# EAGLE board EEPROM AT28C16 Helper (EAGLE 7.6.0)
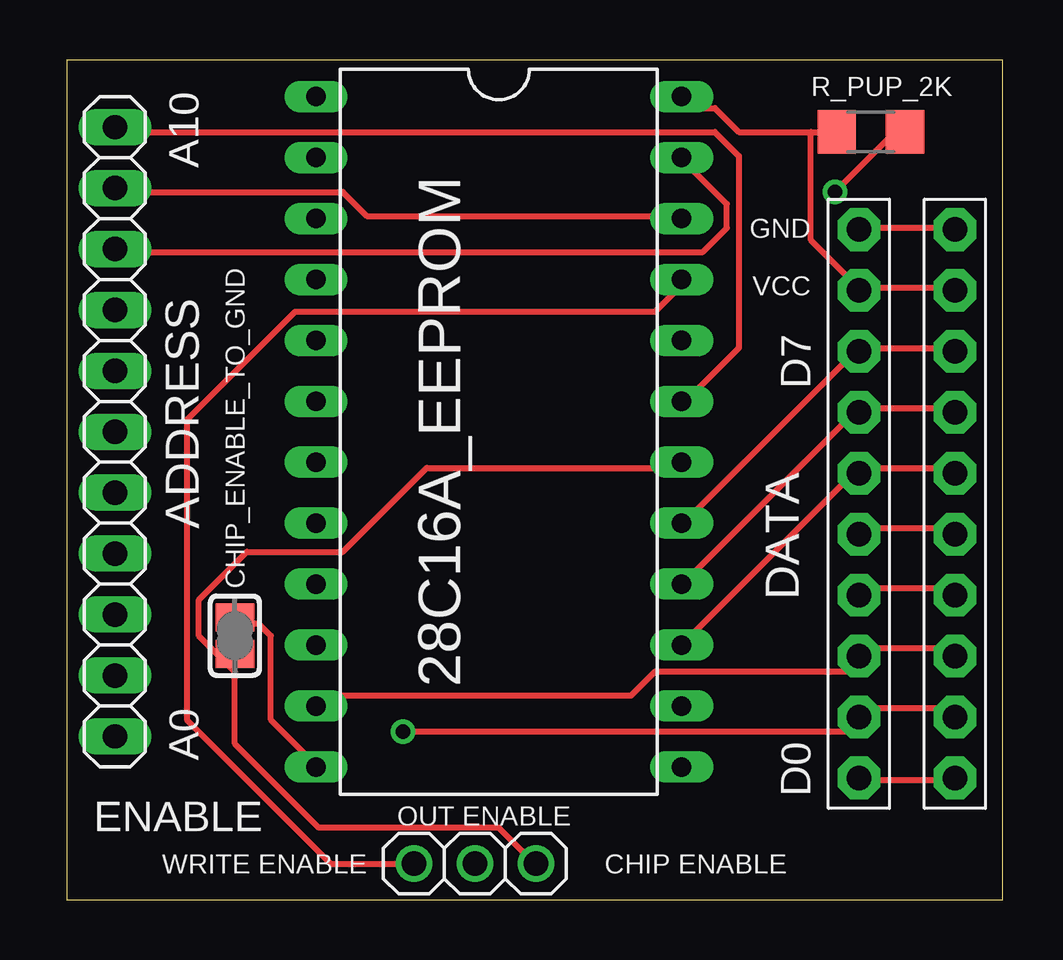
[diagram p0: board, top side]
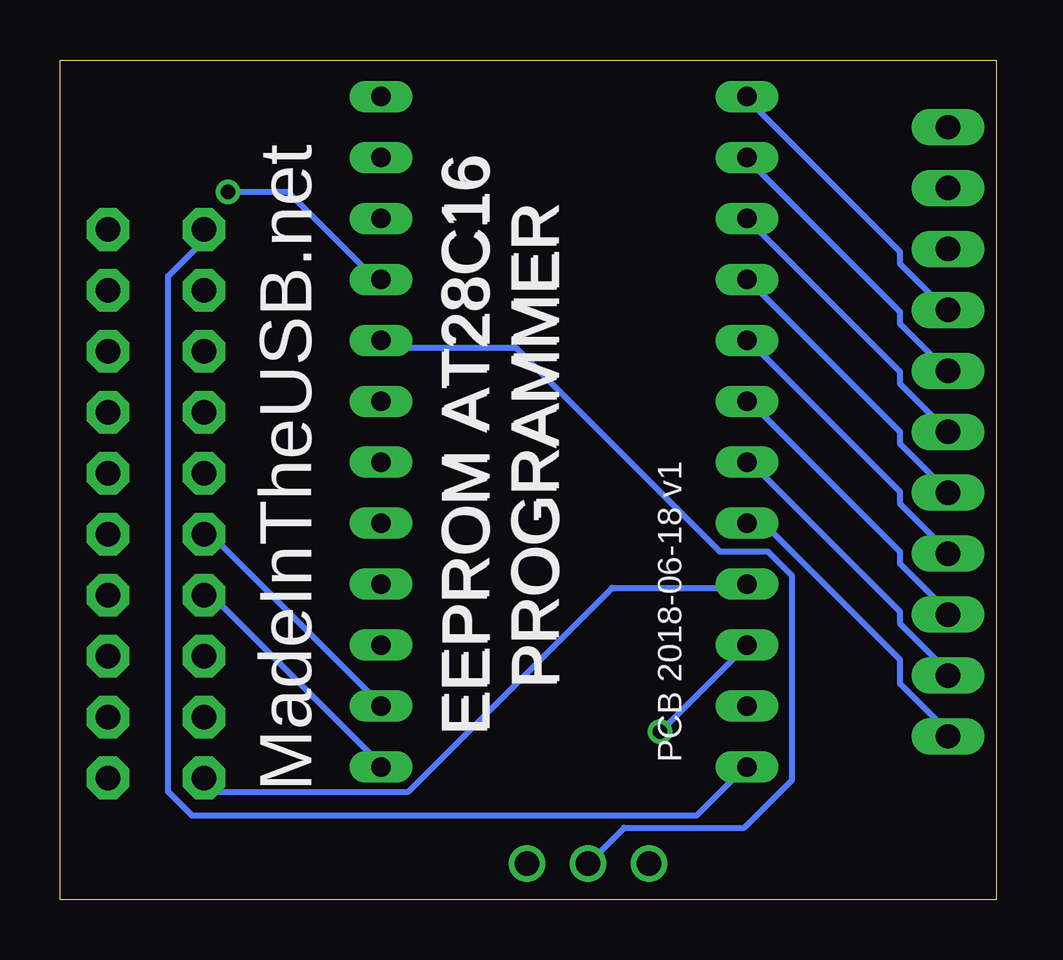
[diagram p1: board, bottom side, seen from below]

Size 39 x 35 mm. Coordinates in mm from the lower left corner, seen from the top.
Outline: 0,0 39,0 39,35 0,35 0,0
Copper layers (1*16): Top 0.035mm / dielectric 1.5mm / Bottom 0.035mm
Design rules "default": minimum track width 10mil, minimum drill 24mil, track to track 8mil, track to pad 8mil, pad to pad 8mil, via to via 8mil, smd to smd 8mil, copper to edge 40mil, drill to drill 8mil, minimum pad ring 10mil, minimum via ring 8mil, stop-mask expansion 4mil, vias tented up to drill 0mil, thermal gap 10mil

## Footprints (pad centres in the part's own frame; a part is rotated, then mirrored left to right if it is on the bottom)
DIL24-6 = drill 0.813 long: 1 -13.97,-7.62; 2 -11.43,-7.62; 3 -8.89,-7.62; 4 -6.35,-7.62; 5 -3.81,-7.62; 6 -1.27,-7.62; 7 1.27,-7.62; 8 3.81,-7.62; 9 6.35,-7.62; 10 8.89,-7.62; 11 11.43,-7.62; 12 13.97,-7.62; 13 13.97,7.62; 14 11.43,7.62; 15 8.89,7.62; 16 6.35,7.62; 17 3.81,7.62; 18 1.27,7.62; 19 -1.27,7.62; 20 -3.81,7.62; 21 -6.35,7.62; 22 -8.89,7.62; 23 -11.43,7.62; 24 -13.97,7.62
1X11 = drill 1.016 long: 1 -12.7,0; 2 -10.16,0; 3 -7.62,0; 4 -5.08,0; 5 -2.54,0; 6 0,0; 7 2.54,0; 8 5.08,0; 9 7.62,0; 10 10.16,0; 11 12.7,0
SOLDERJUMPER_REFLOW = smd 1.168 x 1.6: 1 -0.762,0; 2 0.762,0
1X10-BIG = drill 1.016 pad 1.778 octagon: 1 -11.43,0; 2 -8.89,0; 3 -6.35,0; 4 -3.81,0; 5 -1.27,0; 6 1.27,0; 7 3.81,0; 8 6.35,0; 9 8.89,0; 10 11.43,0
1X03 = drill 1.016: 1 -2.54,0; 2 0,0; 3 2.54,0
R1206 = smd 1.6 x 1.803: 1 -1.422,0; 2 1.422,0

## Placement (x,y rotation side)
28C16A_EEPROM  28C16AP  [DIL24-6]  18,19.5 270 top
ADDRESS  [1X11]  2,19.5 90 top
CHIP_ENABLE_TO_GND  [SOLDERJUMPER_REFLOW]  7,11 270 top
DATA  PINHD-1X10  [1X10-BIG]  33,16.5 90 top
DATA2  PINHD-1X10  [1X10-BIG]  37,16.5 90 top
ENABLE  [1X03]  17,1.5 0 top
R_PUP_2K  [R1206]  33.5,32 0 top

## Library data of the parts
28C16A_EEPROM = microchip; MPN: CAT28C16ALI-12; OC_FARNELL: 1718292; OC_NEWARK: 06R0648
ADDRESS = pinhead
CHIP_ENABLE_TO_GND = microbuilder
DATA DATA2 ENABLE R_PUP_2K = adafruit

## Nets
A0: 28C16A_EEPROM.8 ADDRESS.1
A1: 28C16A_EEPROM.7 ADDRESS.2
A2: 28C16A_EEPROM.6 ADDRESS.3
A3: 28C16A_EEPROM.5 ADDRESS.4
A4: 28C16A_EEPROM.4 ADDRESS.5
A5: 28C16A_EEPROM.3 ADDRESS.6
A6: 28C16A_EEPROM.2 ADDRESS.7
A7: 28C16A_EEPROM.1 ADDRESS.8
A8: 28C16A_EEPROM.23 ADDRESS.9
A9: 28C16A_EEPROM.22 ADDRESS.10
A10: 28C16A_EEPROM.19 ADDRESS.11
CHIP_ENABLE: 28C16A_EEPROM.18 CHIP_ENABLE_TO_GND.2 ENABLE.3
D0: 28C16A_EEPROM.9 DATA2.1 DATA.1
D1: 28C16A_EEPROM.10 DATA2.2 DATA.2
D2: 28C16A_EEPROM.11 DATA2.3 DATA.3
D3: 28C16A_EEPROM.13 DATA2.4 DATA.4
D4: 28C16A_EEPROM.14 DATA2.5 DATA.5
D5: 28C16A_EEPROM.15 DATA2.6 DATA.6
D6: 28C16A_EEPROM.16 DATA2.7 DATA.7
D7: 28C16A_EEPROM.17 DATA2.8 DATA.8
GND: 28C16A_EEPROM.12 CHIP_ENABLE_TO_GND.1 DATA2.10 DATA.10
OUT_ENABLE: 28C16A_EEPROM.20 ENABLE.2
VCC: 28C16A_EEPROM.24 DATA2.9 DATA.9 R_PUP_2K.1
WRITE_ENABLE: 28C16A_EEPROM.21 ENABLE.1 R_PUP_2K.2

## Tracks (layer width: path | path; a pad name or v marks a point on that pad's centre or on a via)
A0
  Bottom 0.254: 28C16A_EEPROM.8 10,15.5 9.5,15.5 4,10 4,9 2,7 ADDRESS.1
A1
  Bottom 0.254: 28C16A_EEPROM.7 10,18 4,12 4,11.5 2,9.5 ADDRESS.2
A2
  Bottom 0.254: 28C16A_EEPROM.6 10,20.5 4,14.5 4,14 2,12 ADDRESS.3
A3
  Bottom 0.254: 28C16A_EEPROM.5 10,23 4,17 4,16.5 2,14.5 ADDRESS.4
A4
  Bottom 0.254: 28C16A_EEPROM.4 10,25.5 4,19.5 4,19 2,17 ADDRESS.5
A5
  Bottom 0.254: ADDRESS.6 4,21.5 4,22 10,28 28C16A_EEPROM.3
A6
  Bottom 0.254: 28C16A_EEPROM.2 10,30.5 4,24.5 4,24 2,22 ADDRESS.7
A7
  Bottom 0.254: 28C16A_EEPROM.1 10,33 4,27 4,26.5 2,24.5 ADDRESS.8
A8
  Top 0.254: 28C16A_EEPROM.23 26,30.5 27.5,29 27.5,28 26.5,27 2,27 ADDRESS.9
A9
  Top 0.254: 28C16A_EEPROM.22 25.5,28.5 12.5,28.5 11.5,29.5 2,29.5 ADDRESS.10
A10
  Top 0.254: 28C16A_EEPROM.19 26,21 28,23 28,31 27,32 2,32 ADDRESS.11
CHIP_ENABLE
  Top 0.254: 7,9.5 7,6.5 10.5,3 18,3 19.5,1.5 ENABLE.3 | 7,9.5 CHIP_ENABLE_TO_GND.2 | 7,9.5 5.5,11 5.5,12.5 7.5,14.5 11.5,14.5 15,18 25.5,18 28C16A_EEPROM.18
D0
  Top 0.254: DATA2.1 37,5 33,5 DATA.1
  Bottom 0.254: 28C16A_EEPROM.9 10.5,13 16,13 24.5,4.5 32.5,4.5 33,5 DATA.1
D1  (via drill 0.61)
  Top 0.254: v14,7 32.5,7 33,7.5 DATA.2 33,8 37,8 DATA2.2
  Bottom 0.254: v14,7 10.5,10.5 28C16A_EEPROM.10
D2
  Top 0.254: 28C16A_EEPROM.11 10.5,8.5 23.5,8.5 24.5,9.5 32.5,9.5 33,10 DATA.3 33,10.5 37,10.5 DATA2.3
D3
  Top 0.254: DATA2.4 37,13 33,13 DATA.4
  Bottom 0.254: 28C16A_EEPROM.13 26,6 33,13 DATA.4
D4
  Top 0.254: DATA2.5 37,15.5 33,15.5 DATA.5
  Bottom 0.254: 28C16A_EEPROM.14 26,8.5 33,15.5 DATA.5
D5
  Top 0.254: 33,18 26,11 28C16A_EEPROM.15 | 33,18 37,18 DATA2.6 | 33,18 DATA.6
D6
  Top 0.254: 33,20.5 26,13.5 28C16A_EEPROM.16 | 33,20.5 37,20.5 DATA2.7 | 33,20.5 DATA.7
D7
  Top 0.254: 33,23 26,16 28C16A_EEPROM.17 | 33,23 37,23 DATA2.8 | 33,23 DATA.8
GND
  Top 0.254: DATA.10 33,28 37,28 DATA2.10 | CHIP_ENABLE_TO_GND.1 7,11.5 8,11.5 8.5,11 8.5,7.5 10,6 28C16A_EEPROM.12
  Bottom 0.254: DATA.10 33,27.5 34.5,26 34.5,4.5 33.5,3.5 12.5,3.5 10.5,5.5 28C16A_EEPROM.12
OUT_ENABLE
  Bottom 0.254: ENABLE.2 15.5,3 10.5,3 8.5,5 8.5,13.5 9.5,14.5 11.5,14.5 20,23 25.5,23 28C16A_EEPROM.20
VCC
  Top 0.254: 31,32 28,32 27,33 26,33 28C16A_EEPROM.24 | 31,32 R_PUP_2K.1 | 33,25.5 37,25.5 DATA2.9 | 31,32 31,27.5 33,25.5 | 33,25.5 DATA.9
WRITE_ENABLE  (via drill 0.61)
  Top 0.254: v32,29.5 34.5,32 R_PUP_2K.2 | ENABLE.1 11,1.5 5,7.5 5,20 9.5,24.5 24.5,24.5 25.5,25.5 28C16A_EEPROM.21
  Bottom 0.254: v32,29.5 29.5,29.5 26,26 28C16A_EEPROM.21

## Text on the board
tNames: A10 | GND | VCC | D7 | A0 | OUT ENABLE | D0 | WRITE ENABLE | CHIP ENABLE
bNames: PCBv1 2017.08 | EEPROM AT28C16 / PROGRAMMER | EEPROM AT28C16 / PROGRAMMER | MadeInTheUSB.net | PCB 2018-06-18 v1